# Altium PCB PCB1.PcbDoc
Units mm, origin at the board's own origin, x right, y up, seen from the top; angles counter-clockwise.
Board outline 50 x 40 mm, 4 copper layers (Top Layer, Layer 1, Layer 2, Bottom Layer), stack 1.56 mm thick; 21 components, 8 nets, 43 pads, 22 vias.
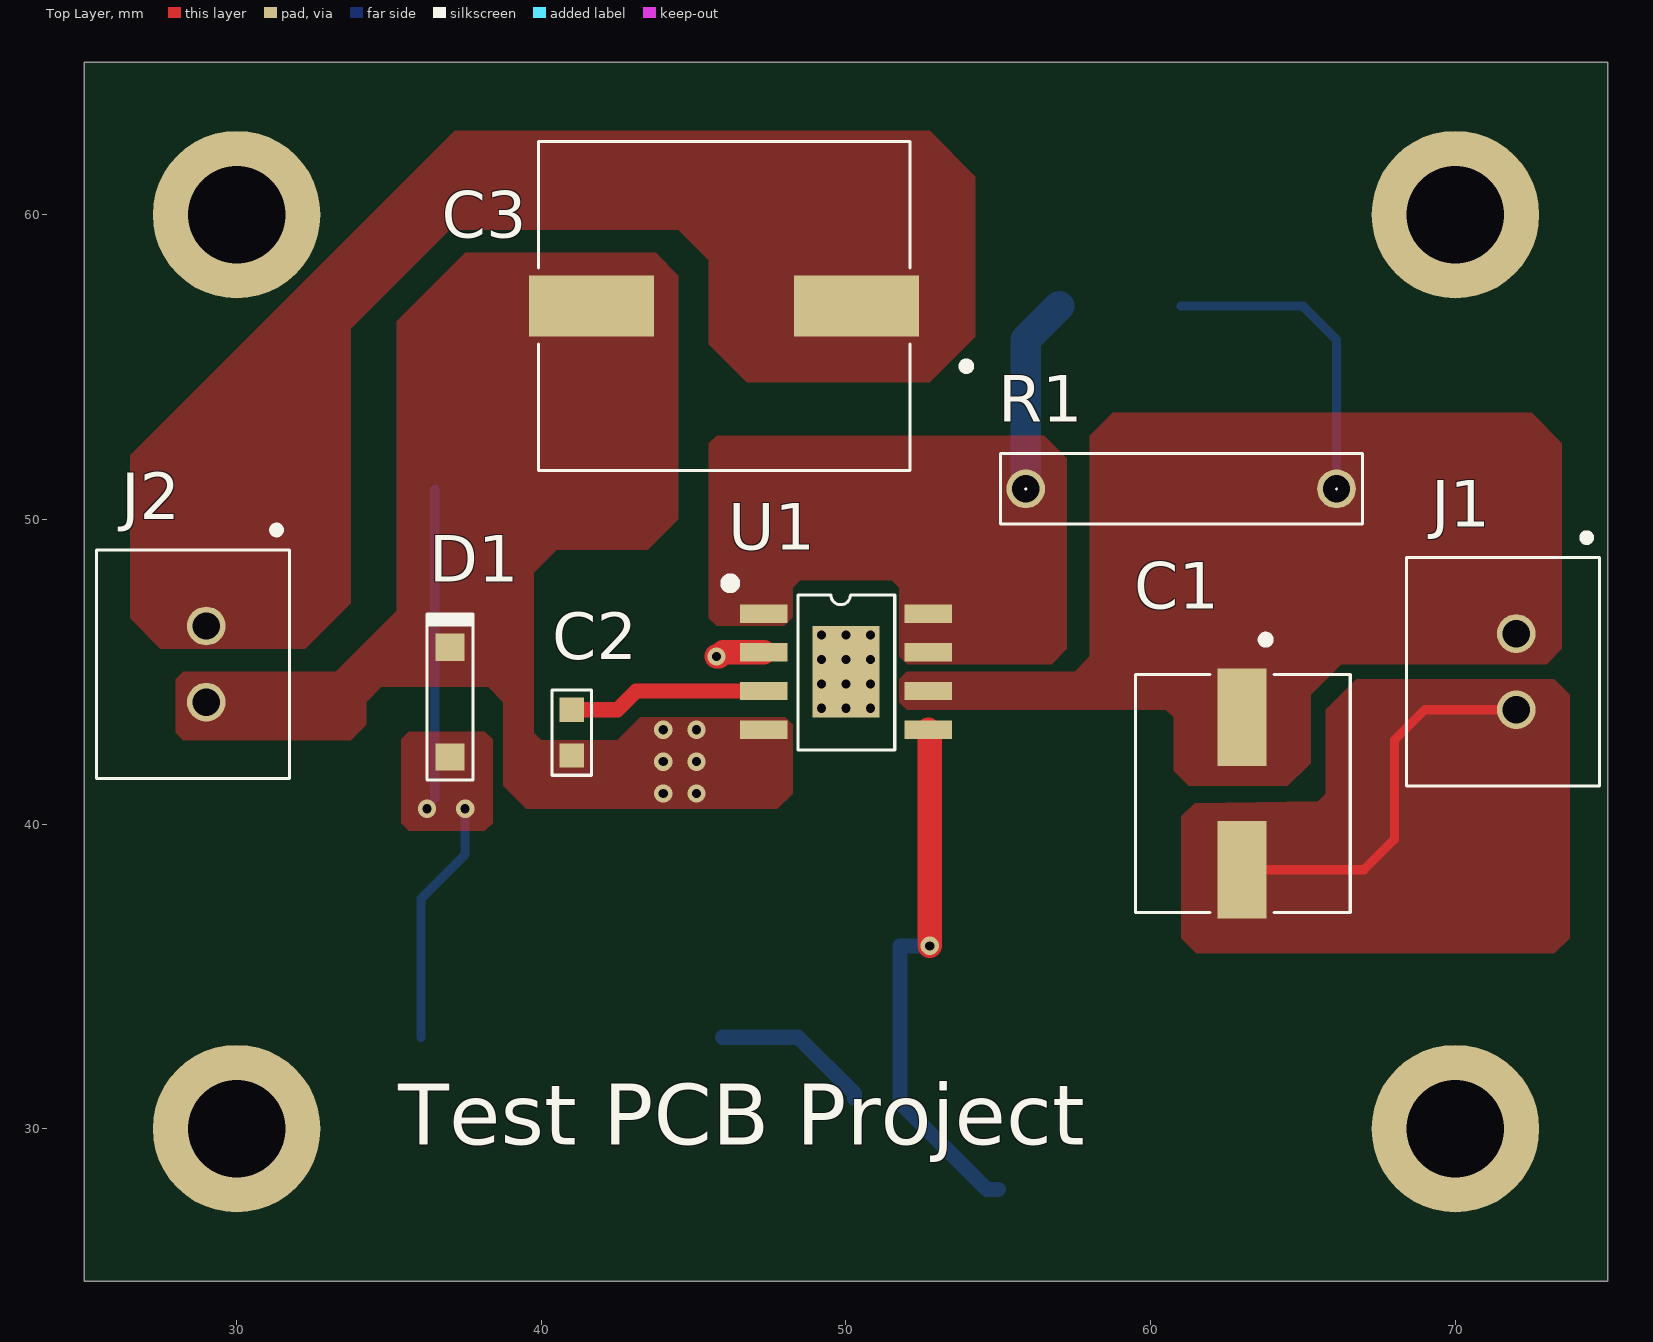
[diagram p0: Top Layer view]
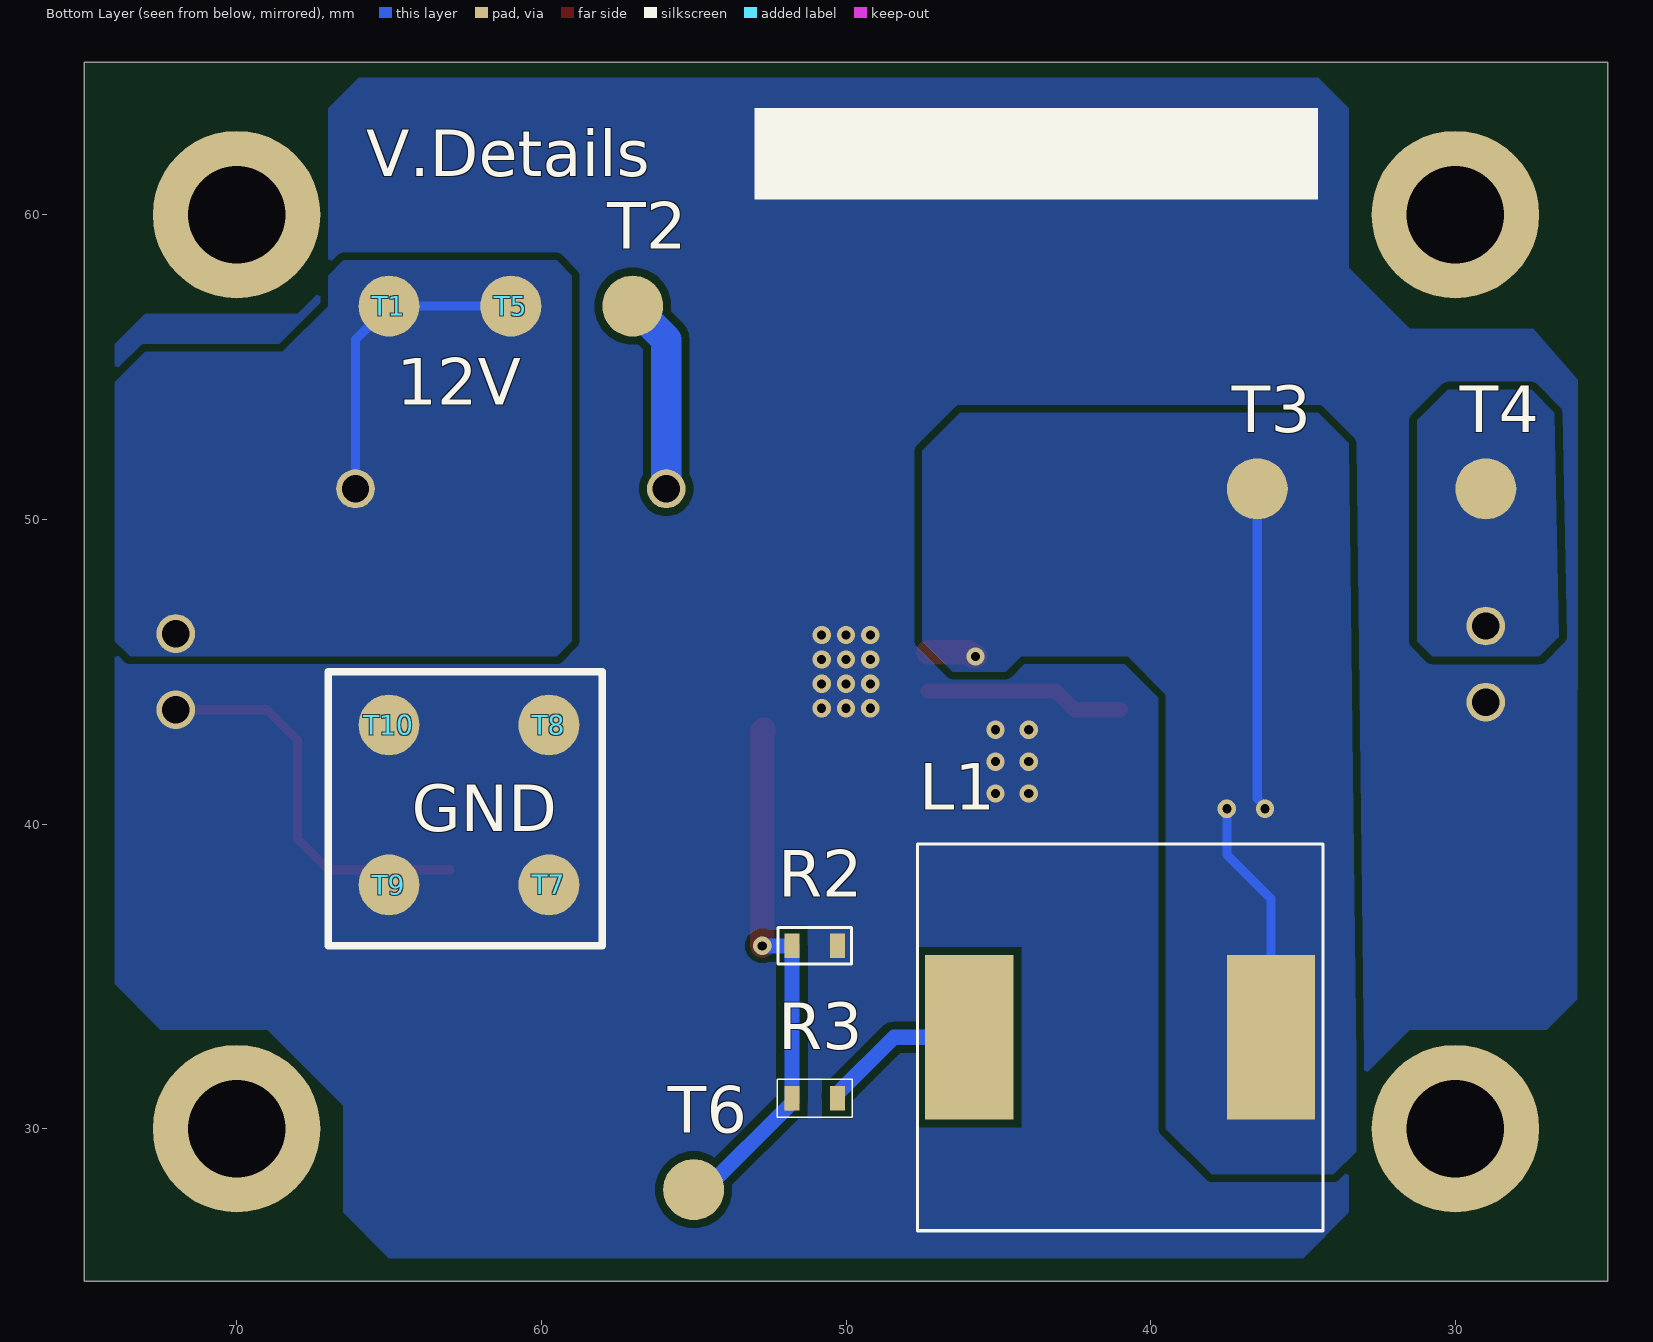
[diagram p1: Bottom Layer view, seen from below]
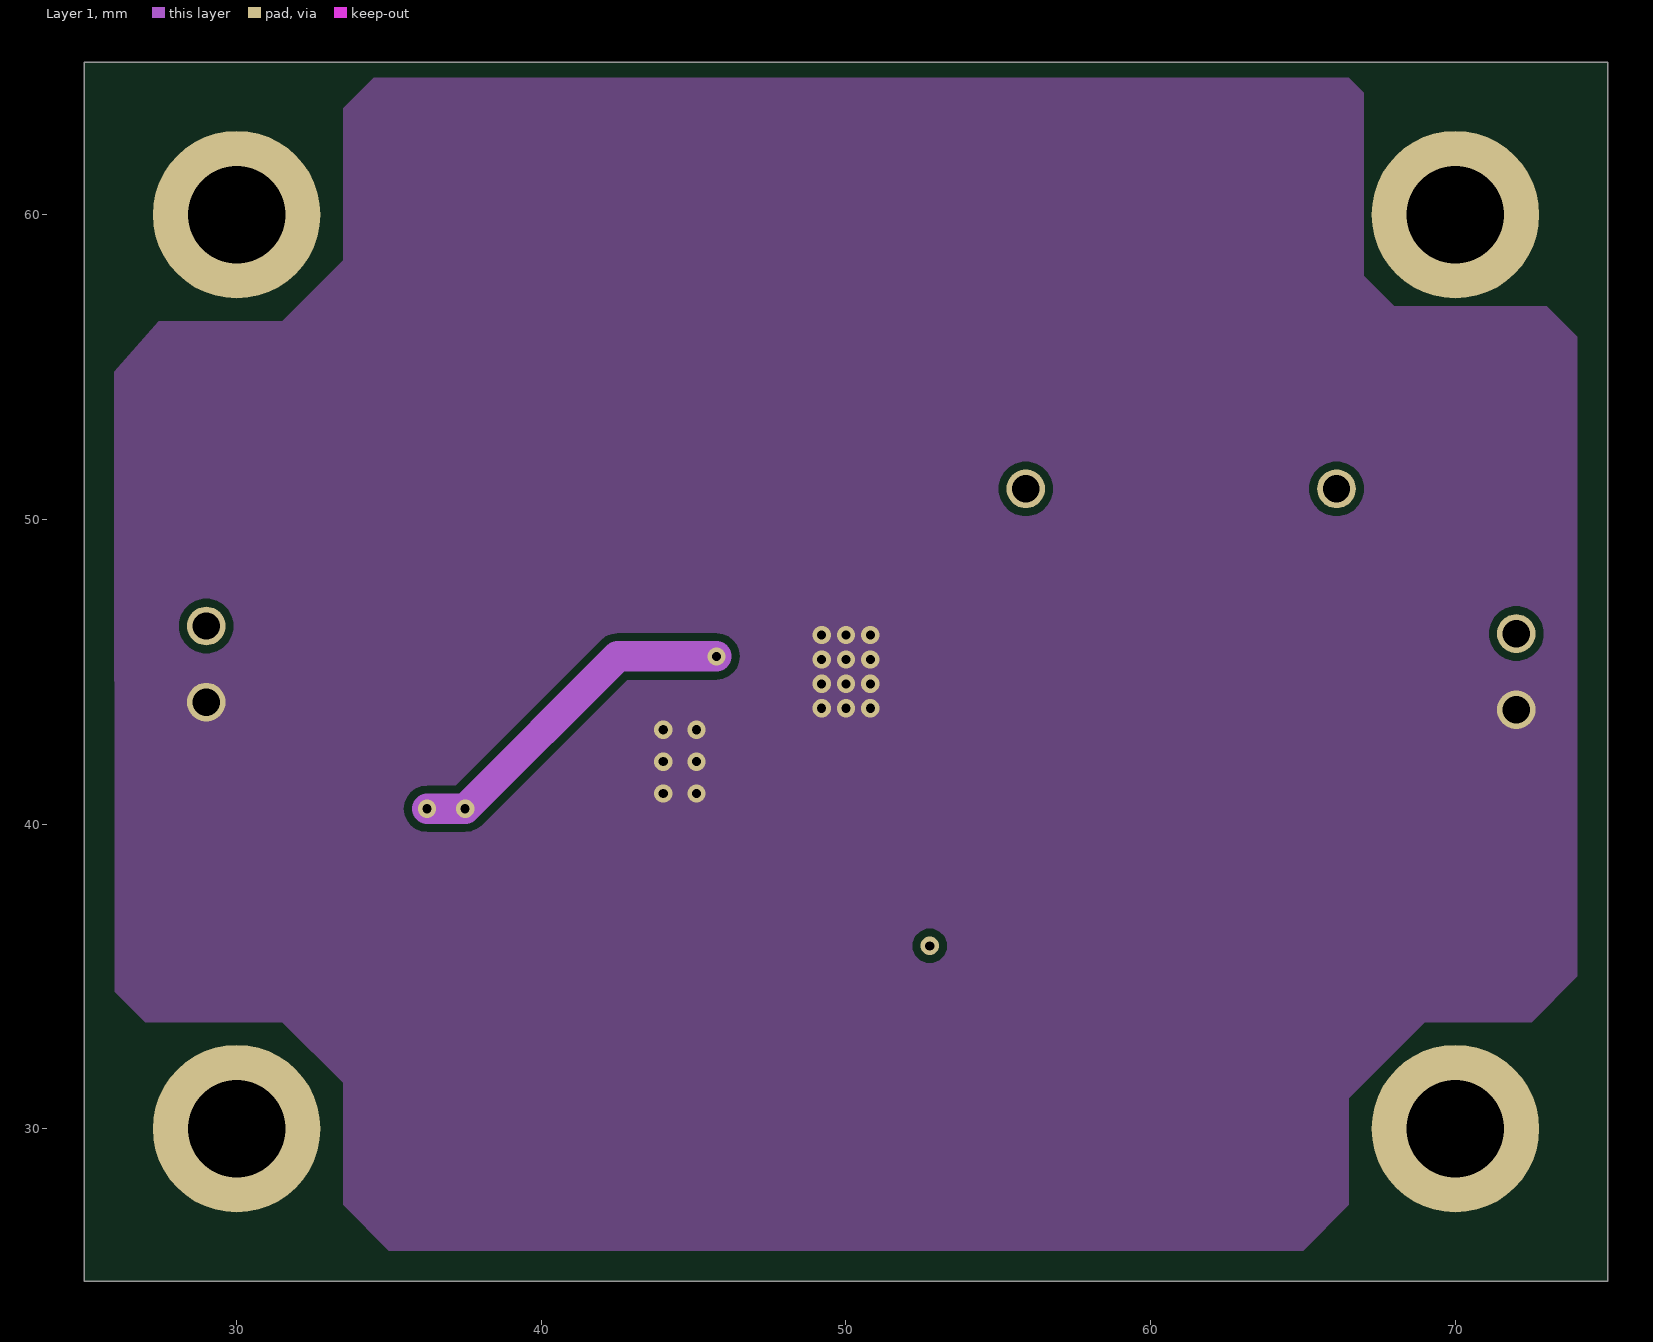
[diagram p2: Layer 1]
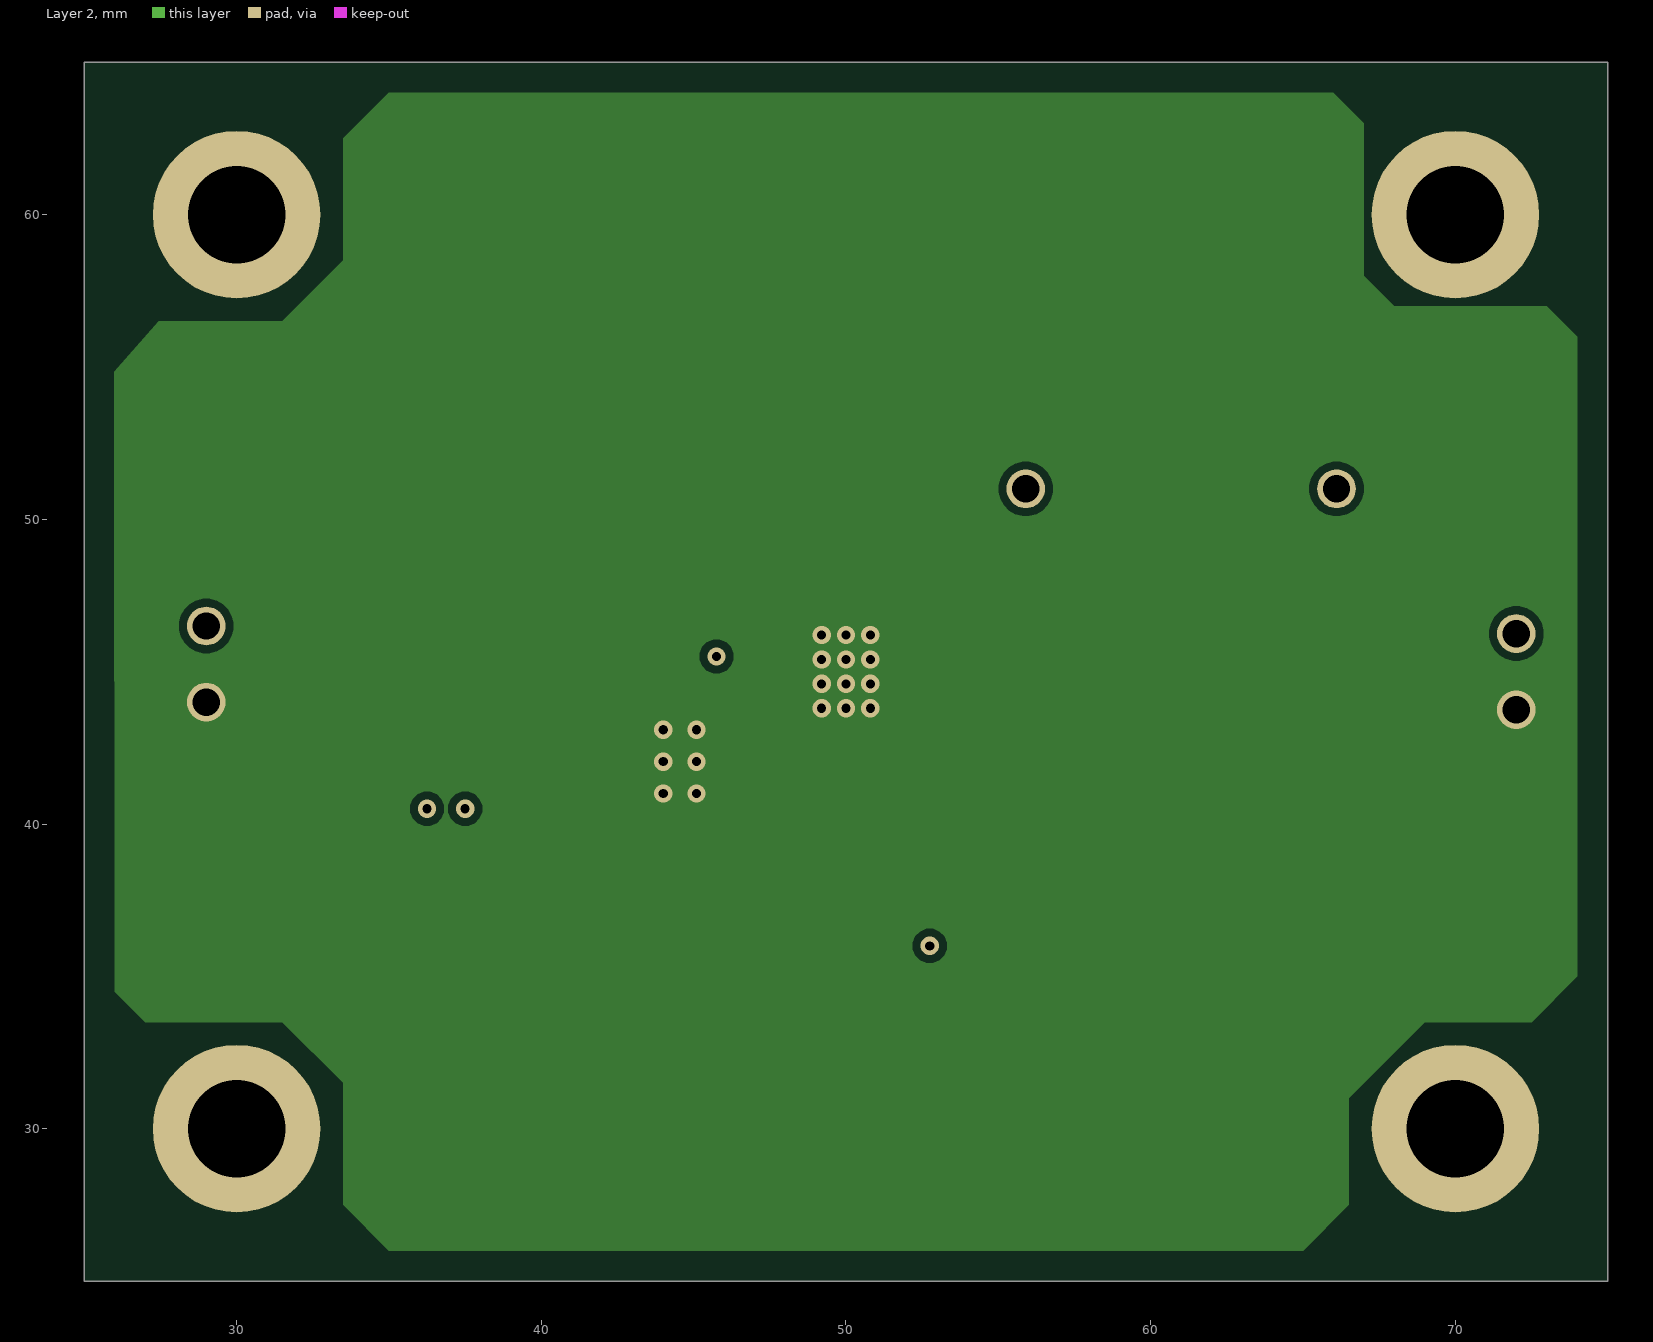
[diagram p3: Layer 2]
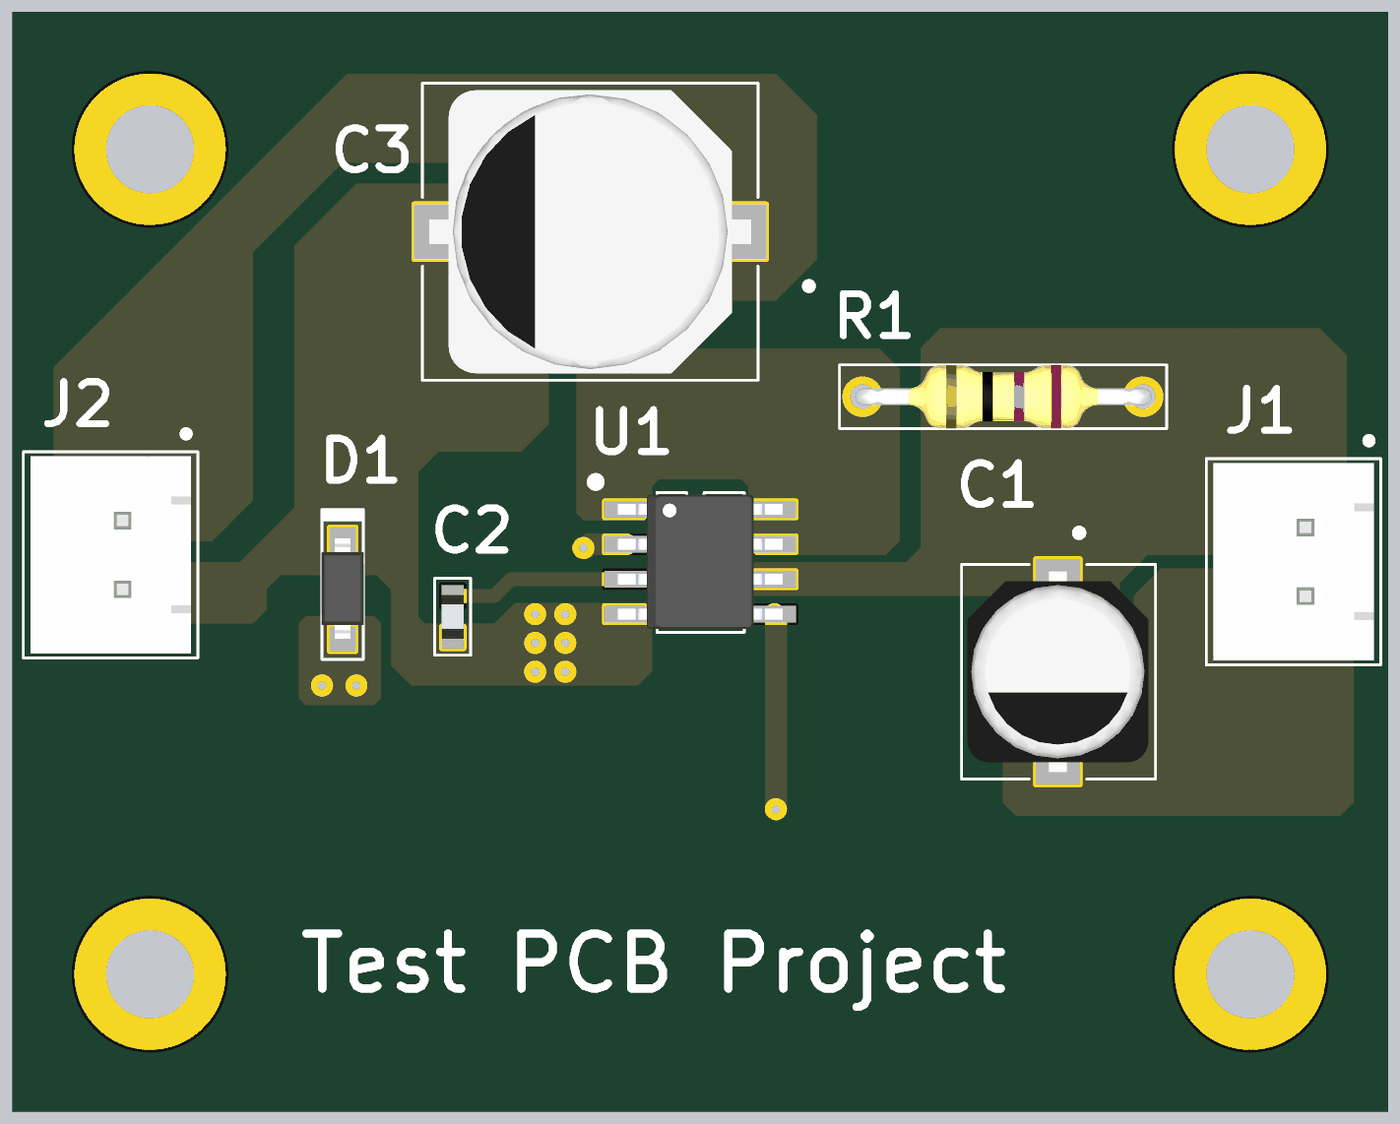
[diagram p4: 3D render of the assembled board from above, using the file's embedded part models]
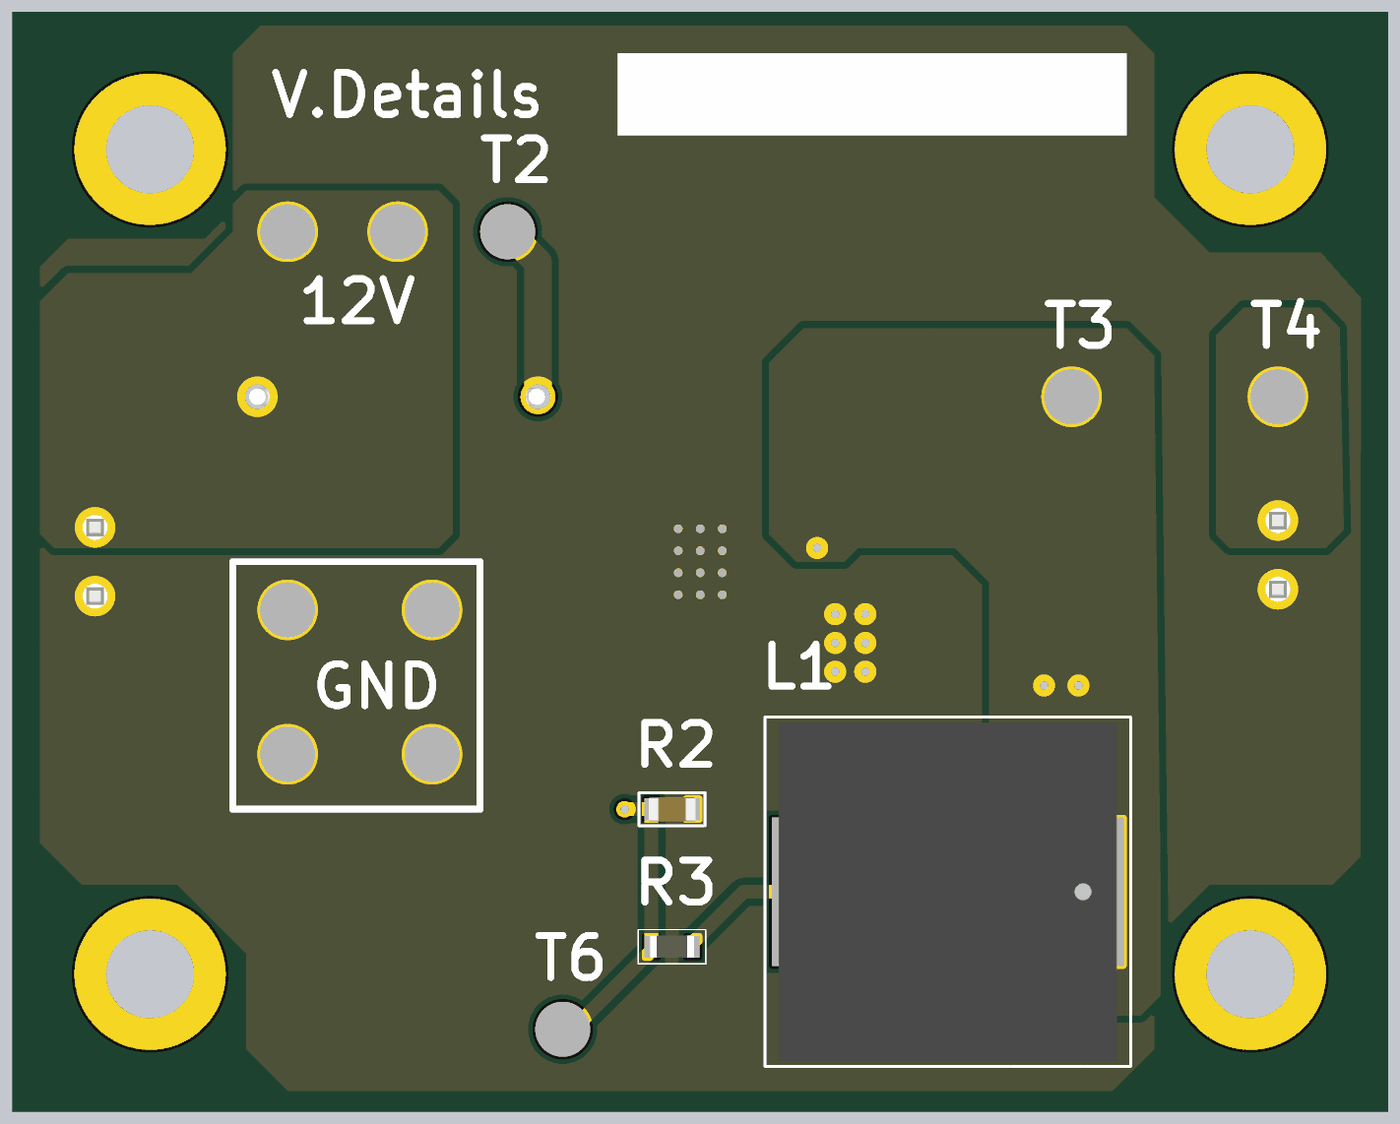
[diagram p5: 3D render of the assembled board from below, using the file's embedded part models]

## Layer stack, top to bottom
Top Solder: solder mask 0.01, Solder Resist, Dk 3.5
Top Layer: signal copper 0.035
Dielectric 2: prepreg 0.11, PP-006, Dk 4.1
Layer 1: signal copper 0.035
Dielectric 1: dielectric 1.2, FR-4, Dk 4.8
Layer 2: signal copper 0.035
Dielectric 3: prepreg 0.11, PP-006, Dk 4.1
Bottom Layer: signal copper 0.035
Bottom Solder: solder mask 0.01, Solder Resist, Dk 3.5

## Board outline
25,25 25,65 75,65 75,25

## Design rules (kind name [scope] priority, off if disabled: settings)
Clearance [All] p1: gap=0.254 ignorepadtopadclearanceinfootprint=FALSE except(0: Arc-Hole Track-Hole SMDPad-Hole THPad-Hole Via-Hole Fill-Hole Poly-Hole Region-Hole Text-Hole)
ComponentClearance [All] p1: gap=0.2 collisioncheckmode=3 verticalgap=0.2 showdistances=FALSE
HoleSize [All] p1: absolutevalues=TRUE maxlimit=10 minlimit=0.2 maxpercent=80.000 minpercent=20.000
HoleToHoleClearance [All] p1: gap=0.2 allowstackedmicrovias=TRUE
MinimumSolderMaskSliver [All] p1: minsoldermaskwidth=0.2
PlaneClearance [All] p1: clearance=0.2
PlaneConnect [All] p1: planeconnectstyle=Direct reliefexpansion=0.508 reliefentries=4 reliefconductorwidth=0.254 reliefairgap=0.254
PolygonConnect [All] p1: connectstyle=Direct reliefconductorwidth=0.254 reliefentries=4 polygonreliefangle="90 Angle" airgapwidth=0.254
RoutingVias [All] p1: holewidth=0.3 width=0.6 viastyle="Through Hole" minholewidth=0.3 minwidth=0.6 maxholewidth=0.3 maxwidth=0.6
SilkToSilkClearance [All] p1: silktosilkclearance=0.2
SilkToSolderMaskClearance [IsPad] p1: minsilkscreentomaskgap=0.2 clearancetoexposedcopper=TRUE
SolderMaskExpansion [All] p1: expansion=0.102 istentingtop=FALSE
Width [All] p1: maxlimit=10 minlimit=0.254 preferedwidth=0.3
22 further rules are at their usual default settings.

## Components (designator, comment, footprint, x,y, rotation, side; value= is the part's Value field where it differs from the comment)
C1 "EEEFK1C101P" EEE-FK1C101P 63,41 r90 top
C2 "885012006012" 885012006012 41,43 r90 top
C3 "EEEFK1E471P" EEE-FK1E471P 46,57 r0 top
D1 "1N5819" 1N5819 37,44 r90 top
J1 "B2B-EH-A(LF)(SN)" B2B-EH-A(LF)(SN) 72,45 r270 top
J2 "B2B-EH-A(LF)(SN)" B2B-EH-A(LF)(SN) 29,45.25 r270 top
L1 "74477120" 74477120_INDUCTOR 41,33 r270 bottom
R1 "H826R1BZA" H826R1BZA 61,51 r180 top value=26.1R
R2 "KTR03EZPF6201" KTR03EZPF6201 51.025,36 r180 bottom value=6.2kR
R3 "SDR03EZPJ202" SDR03EZPJ202 51,31 r0 bottom
T1 "Test Pad" "TEST POINT" 65,57 r180 bottom
T2 "Test Pad" "TEST POINT" 57,57 r180 bottom
T3 "Test Pad" "TEST POINT" 36.5,51 r180 bottom
T4 "Test Pad" "TEST POINT" 29,51 r180 bottom
T5 "Test Pad" "TEST POINT" 61,57 r180 bottom
T6 "Test Pad" "TEST POINT" 55,28 r180 bottom
T7 "Test Pad" "TEST POINT" 59.75,38 r180 bottom
T8 "Test Pad" "TEST POINT" 59.75,43.25 r180 bottom
T9 "Test Pad" "TEST POINT" 65,38 r0 bottom
T10 "Test Pad" "TEST POINT" 65,43.25 r180 bottom
U1 "MC34063ADR" MC34063ADR 50,45 r0 top

## Footprints (in the part's own frame and the unit in brackets; to place one, negate y for a bottom-side part, rotate by r counter-clockwise, add the part's x,y. Pads: shape width x height; smd on the part's side, far side on the other; paste and mask are expansions set on the pad)
1N5819 [mm] "SOD_23"
  rect 0.9x0.95 smd: 1(-1.8,0) 2(1.8,0)
  silkscreen extent -2.55,-0.75 2.9,0.75, body extent -1.8,-0.77 1.85,0.77, height 1.5
74477120_INDUCTOR [mm]
  rect 5.4x2.9 smd: 1(0,4.95) 2(0,-4.95)
  silkscreen extent -6.35,-6.65 6.35,6.65, body extent -6.15,-6.15 6.15,6.15, height 6.12
885012006012 [mm] "CAP_0603"
  rect 0.8x0.8 smd: 1(-0.75,0) 2(0.75,0)
  silkscreen extent -1.4,-0.65 1.4,0.65, body extent -0.8,-0.4 0.8,0.4, height 0.8
B2B-EH-A(LF)(SN) [mm] "JST 2-PIN CONN"
  round 1.27 hole 0.9: 1(-1.25,0) 2(1.25,0)
  silkscreen extent -4.51,-3.6 3.75,2.74, body extent -3.59,-3.35 3.59,2.49, height 7.26
EEE-FK1C101P [mm] "PANASONIC_CAP_AE_D"
  rect 3.2x1.6 smd: 1(-2.5,0) 2(2.5,0)
  silkscreen extent -3.9,-3.55 5.18,3.5, body extent -3.65,-3.3 3.65,3.3, height 5.83
EEE-FK1E471P [mm] "CAP_AE_G (ø10x10.2L)"
  rect 4.1x2 smd: 1(-4.35,0) 2(4.35,0)
  silkscreen extent -6.1,-5.4 8.08,5.4, body extent -5.85,-5.15 5.85,5.15, height 10.2
H826R1BZA [mm] "RES_TH"
  round 1.27 hole 0.9: 1(-5.1,0) 2(5.1,0)
  silkscreen extent -5.96,-1.16 5.93,1.16, body extent -5.4,-1.16 5.36,1.16, height 2.93
KTR03EZPF6201 [mm] "RES_0603"
  rect 0.5x0.8 smd: 1(-0.75,0) 2(0.75,0)
  silkscreen extent -1.2,-0.6 1.2,0.6, body extent -0.85,-0.44 0.85,0.44, height 0.56
MC34063ADR [mm] "SOP_8"
  rect 1.55x0.6 smd: 1(-2.7,1.905) 2(-2.7,0.635) 3(-2.7,-0.635) 4(-2.7,-1.905) 5(2.7,-1.905) 6(2.7,-0.635) 7(2.7,0.635) 8(2.7,1.905)
  rect 2.2x3 smd: 9(0,0)
  silkscreen extent -3.95,-2.57 1.6,3.05, body extent -3,-2.45 3,2.45, height 1.75
SDR03EZPJ202 [mm] "RES_0603"
  rect 0.5x0.8 smd: 1(-0.725,0) 2(0.775,0)
  silkscreen extent -1.2,-0.63 1.25,0.63, body extent -0.77,-0.4 0.83,0.4, height 0.55
"TEST POINT" [mm]
  round 2 smd: 1(0,0)

## Part data
C1: "Cap Aluminum 100uF 16V 20% (6.3 X 5.8mm) SMD 240mA 2000 hr 105°C T/R", Manufacturer=Panasonic, Supplier Part Number=667-EEE-FK1C101P, Category="Aluminum Electrolytic Capacitors", ComponentLink1Description=https://datasheet.ciiva.com/19479/1357482-19479360.pdf?src-supplier=Jameco, ComponentLink1URL=https://datasheet.ciiva.com/19479/1357482-19479360.pdf?src-supplier=Jameco, ComponentLink2Description=https://datasheet.ciiva.com/11777/0900766b80e4e8b0-11777237.pdf?src-supplier=Rs, ComponentLink2URL=https://datasheet.ciiva.com/11777/0900766b80e4e8b0-11777237.pdf?src-supplier=Rs, ComponentLink3Description=https://datasheet.ciiva.com/29313/443464-da-01-en-smd-elko-vfk-d-100-uf-16v-29313488.pdf?src-supplier=Conrad, ComponentLink3URL=https://datasheet.ciiva.com/29313/443464-da-01-en-smd-elko-vfk-d-100-uf-16v-29313488.pdf?src-supplier=Conrad, ComponentLink4Description=https://datasheet.ciiva.com/16449/aba0000ce120-16449534.pdf?src-supplier=Future+Electronics, ComponentLink4URL=https://datasheet.ciiva.com/16449/aba0000ce120-16449534.pdf?src-supplier=Future+Electronics, ComponentLink5Description=https://datasheet.ciiva.com/24022/aba0000ce120-24022554.pdf?src-supplier=Mouser, ComponentLink5URL=https://datasheet.ciiva.com/24022/aba0000ce120-24022554.pdf?src-supplier=Mouser, ComponentLink6Description=https://datasheet.ciiva.com/43463/58258-43463495.pdf?src-supplier=Farnell, ComponentLink6URL=https://datasheet.ciiva.com/43463/58258-43463495.pdf?src-supplier=Farnell, ComponentLink7Description=https://datasheet.ciiva.com/2983/aba0000ce120-2983939.pdf?src-supplier=Avnet, ComponentLink7URL=https://datasheet.ciiva.com/2983/aba0000ce120-2983939.pdf?src-supplier=Avnet, ComponentLink8Description=https://datasheet.ciiva.com/30177/aba0000ce120-30177788.pdf?src-supplier=Onlinecomponents.com, ComponentLink8URL=https://datasheet.ciiva.com/30177/aba0000ce120-30177788.pdf?src-supplier=Onlinecomponents.com, ComponentLink9Description=https://datasheet.ciiva.com/14601/70255214-14601005.pdf?src-supplier=Allied+Electronics, ComponentLink9URL=https://datasheet.ciiva.com/14601/70255214-14601005.pdf?src-supplier=Allied+Electronics, ComponentLink10Description=https://datasheet.ciiva.com/46387/1676921-46387918.pdf?src-supplier=Element14, ComponentLink10URL=https://datasheet.ciiva.com/46387/1676921-46387918.pdf?src-supplier=Element14, ComponentLink11Description=https://datasheet.ciiva.com/46376/1676921-46376425.pdf?src-supplier=Element14, ComponentLink11URL=https://datasheet.ciiva.com/46376/1676921-46376425.pdf?src-supplier=Element14, Manufacturer Part Number=EEEFK1C101P, Pricing="1=0.45, 10=0.243, 50=0.243, 100=0.211, 1000=0.125, 10000=0.106 (USD)", RoHS=Yes, Stock=76012, Supplier=Mouser
C2: "Ceramic Capacitor 470pF, 10VDC, 0603, ±5 %", Manufacturer="Wurth Electronics", Supplier Part Number=732-7756-1-ND, Category="Ceramic Capacitors", ComponentLink1Description=http://www.farnell.com/datasheets/2546579.pdf?src-supplier=Farnell, ComponentLink1URL=http://www.farnell.com/datasheets/2546579.pdf?src-supplier=Farnell, ComponentLink2Description=https://katalog.we-online.de/pbs/datasheet/885012006012.pdf?src-supplier=Digi-Key, ComponentLink2URL=https://katalog.we-online.de/pbs/datasheet/885012006012.pdf?src-supplier=Digi-Key, ComponentLink3Description=http://www.farnell.com/datasheets/2546579.pdf?src-supplier=Newark, ComponentLink3URL=http://www.farnell.com/datasheets/2546579.pdf?src-supplier=Newark, Manufacturer Part Number=885012006012, Pricing="1=0.1, 10=0.044, 100=0.039, 500=0.035 (USD)", RoHS=Yes, Stock=15812, Supplier=Digi-Key
C3: "CAP ALUM 470UF 20% 25V SMD", Manufacturer=Panasonic, Supplier Part Number=667-EEE-FK1E471P, Category="Aluminum Electrolytic Capacitors", ComponentLink1Description=https://datasheet.ciiva.com/11777/0900766b80e4e8b0-11777352.pdf?src-supplier=Rs, ComponentLink1URL=https://datasheet.ciiva.com/11777/0900766b80e4e8b0-11777352.pdf?src-supplier=Rs, ComponentLink2Description=https://datasheet.ciiva.com/29313/443472-da-01-en-smd-elko-vfk-g-470-uf-25v-29313562.pdf?src-supplier=Conrad, ComponentLink2URL=https://datasheet.ciiva.com/29313/443472-da-01-en-smd-elko-vfk-g-470-uf-25v-29313562.pdf?src-supplier=Conrad, ComponentLink3Description=https://datasheet.ciiva.com/46376/1676921-46376477.pdf?src-supplier=Element14, ComponentLink3URL=https://datasheet.ciiva.com/46376/1676921-46376477.pdf?src-supplier=Element14, ComponentLink4Description=https://datasheet.ciiva.com/46381/1676921-46381499.pdf?src-supplier=Element14, ComponentLink4URL=https://datasheet.ciiva.com/46381/1676921-46381499.pdf?src-supplier=Element14, ComponentLink5Description=https://datasheet.ciiva.com/46381/58258-46381500.pdf?src-supplier=Element14, ComponentLink5URL=https://datasheet.ciiva.com/46381/58258-46381500.pdf?src-supplier=Element14, ComponentLink6Description=https://datasheet.ciiva.com/16432/aba0000ce120-16432909.pdf?src-supplier=Future+Electronics, ComponentLink6URL=https://datasheet.ciiva.com/16432/aba0000ce120-16432909.pdf?src-supplier=Future+Electronics, Manufacturer Part Number=EEEFK1E471P, Pricing="1=0.97, 10=0.67, 50=0.67, 100=0.505, 1000=0.328, 10000=0.318 (USD)", RoHS=Yes, Stock=24677, Supplier=Mouser
D1: "1N5819 Series Low Drop Power 1 A 40 V Schottky Rectifier Through Hole - DO-41", Manufacturer="Taiwan Semiconductor", Supplier Part Number=1801-1N5819CT-ND, Category="Schottky Diodes", ComponentLink1Description=https://datasheet.ciiva.com/26338/155370-da-01-en-schottky-diode-1-n-5819-tsc-do-41-26338776.pdf?src-supplier=Conrad, ComponentLink1URL=https://datasheet.ciiva.com/26338/155370-da-01-en-schottky-diode-1-n-5819-tsc-do-41-26338776.pdf?src-supplier=Conrad, ComponentLink2Description=https://datasheet.ciiva.com/26309/ql600260-600262-e-26309355.pdf?src-supplier=Distrelec, ComponentLink2URL=https://datasheet.ciiva.com/26309/ql600260-600262-e-26309355.pdf?src-supplier=Distrelec, ComponentLink3Description=https://datasheet.ciiva.com/24491/1n581720series-c10-24491580.pdf?src-supplier=Onlinecomponents.com, ComponentLink3URL=https://datasheet.ciiva.com/24491/1n581720series-c10-24491580.pdf?src-supplier=Onlinecomponents.com, Manufacturer Part Number=1N5819, Pricing="1=0.49, 10=0.399, 100=0.2719, 500=0.20392, 1000=0.15294, 2000=0.1402 (USD)", RoHS=Yes, Stock=2706, Supplier=Digi-Key
J1 J2: "CONN HEADER EH TOP 2POS 2.5MM", Manufacturer=JST, Category="Headers and Wire Housings", ComponentLink1Description=https://datasheet.ciiva.com/26924/getdatasheetpartid-639961-26924027.pdf?src-supplier=Verical, ComponentLink1URL=https://datasheet.ciiva.com/26924/getdatasheetpartid-639961-26924027.pdf?src-supplier=Verical, ComponentLink2Description=https://datasheet.ciiva.com/11746/0900766b805aab1f-11746167.pdf?src-supplier=Rs, ComponentLink2URL=https://datasheet.ciiva.com/11746/0900766b805aab1f-11746167.pdf?src-supplier=Rs, ComponentLink3Description=https://datasheet.ciiva.com/41451/001217319-da-01-en-stiftleiste-gerade-2-pol-rm-25mm-41451366.pdf?src-supplier=Conrad, ComponentLink3URL=https://datasheet.ciiva.com/41451/001217319-da-01-en-stiftleiste-gerade-2-pol-rm-25mm-41451366.pdf?src-supplier=Conrad, ComponentLink4Description=https://datasheet.ciiva.com/712/eeh-712441.pdf?src-supplier=Digi-Key, ComponentLink4URL=https://datasheet.ciiva.com/712/eeh-712441.pdf?src-supplier=Digi-Key, ComponentLink5Description=https://datasheet.ciiva.com/16449/b2b-eh-alfsn-16449468.pdf?src-supplier=Future+Electronics, ComponentLink5URL=https://datasheet.ciiva.com/16449/b2b-eh-alfsn-16449468.pdf?src-supplier=Future+Electronics, Manufacturer Part Number=B2B-EH-A(LF)(SN), Pricing="1=0.1297, 10=0.0976, 25=0.0965, 50=0.0955, 100=0.0702, 500=0.0452 (USD)", RoHS=Yes, Stock=19411, Supplier="Arrow Electronics", Supplier Part Number=B2B-EH-A(LF)(SN)
L1: "Power Choke Shielded Wirewound 100uH 20% 1KHz Ferrite 1.53A 160mOhm DCR T/R", Manufacturer="Wurth Electronics", Supplier Part Number=3338500P, Category="Fixed Inductors", ComponentLink1Description=https://datasheet.ciiva.com/1052/74477120-1052278.pdf?src-supplier=Digi-Key, ComponentLink1URL=https://datasheet.ciiva.com/1052/74477120-1052278.pdf?src-supplier=Digi-Key, ComponentLink2Description=https://datasheet.ciiva.com/4954/74477120-29022-4954590.pdf?src-supplier=Mouser, ComponentLink2URL=https://datasheet.ciiva.com/4954/74477120-29022-4954590.pdf?src-supplier=Mouser, ComponentLink3Description=https://datasheet.ciiva.com/11799/0900766b80bbd134-11799893.pdf?src-supplier=Rs, ComponentLink3URL=https://datasheet.ciiva.com/11799/0900766b80bbd134-11799893.pdf?src-supplier=Rs, ComponentLink4Description=https://datasheet.ciiva.com/1052/74477120-1052279.pdf?src-supplier=Digi-Key, ComponentLink4URL=https://datasheet.ciiva.com/1052/74477120-1052279.pdf?src-supplier=Digi-Key, ComponentLink5Description=https://datasheet.ciiva.com/1052/74477120-1052280.pdf?src-supplier=Digi-Key, ComponentLink5URL=https://datasheet.ciiva.com/1052/74477120-1052280.pdf?src-supplier=Digi-Key, ComponentLink6Description=https://datasheet.ciiva.com/26308/rl74477120-data-de-26308263.pdf?src-supplier=Distrelec, ComponentLink6URL=https://datasheet.ciiva.com/26308/rl74477120-data-de-26308263.pdf?src-supplier=Distrelec, ComponentLink7Description=https://datasheet.ciiva.com/48691/001087759-da-01-ml-we-pd-smd-speicherdrossel-74477120-de-en-48691212.pdf?src-supplier=Conrad, ComponentLink7URL=https://datasheet.ciiva.com/48691/001087759-da-01-ml-we-pd-smd-speicherdrossel-74477120-de-en-48691212.pdf?src-supplier=Conrad, Manufacturer Part Number=74477120, RoHS=Yes, Stock=1, Supplier=Rs
R1: "Metal Film Resistors - Through Hole H8 26R1 0.1% 100PPM", Case/Package=Axial, Manufacturer="TE Connectivity", Max Operating Temperature=155°C, Max Power Dissipation=250mW, Min Operating Temperature=-55°C, Number of Resistors=1, Package Quantity=250, Resistor Type="Thin Film", Supplier Part Number=H826R1BZA-ND, Temperature Coefficient=100ppm/°C, Tolerance=0.1%, Voltage Rating=350V, Category=Uncategorized, ComponentLink1Description=https://datasheet.ciiva.com/12654/eng-ds-1773230-g-12654485.pdf?src-supplier=Mouser, ComponentLink1URL=https://datasheet.ciiva.com/12654/eng-ds-1773230-g-12654485.pdf?src-supplier=Mouser, Diameter=2.5mm, ELV=Compliant, Length=7.2mm, Manufacturer Part Number=H826R1BZA, Mounting Technology=Axial, Number of Terminations=2, Packaging=Bulk, Power Rating=250mW, Pricing="500=0.61476 (USD)", RoHS=Yes, RoHS Compliant=Yes, Series="Holco, Holsworthy", Supplier=Digi-Key, Termination=Axial, Weight=0.008466oz
R2: "Res High Voltage 0603 6.2K Ohm 1/10W 1% SMD", Case Code (Imperial)=0603, Case Code (Metric)=1608, Manufacturer=Rohm, Max Operating Temperature=155°C, Max Power Dissipation=100mW, Min Operating Temperature=-55°C, Ratings=AEC-Q200, Supplier Part Number=RHM6.2KAYCT-ND, Temperature Coefficient=100ppm/°C, Tolerance=1%, Case/Package=0603, Category="Chip SMD Resistors", ComponentLink1Description=https://datasheet.ciiva.com/14928/ktr-14928509.pdf?src-supplier=Digi-Key, ComponentLink1URL=https://datasheet.ciiva.com/14928/ktr-14928509.pdf?src-supplier=Digi-Key, ComponentLink2Description=https://datasheet.ciiva.com/14930/ktr-14930279.pdf?src-supplier=Digi-Key, ComponentLink2URL=https://datasheet.ciiva.com/14930/ktr-14930279.pdf?src-supplier=Digi-Key, ComponentLink3Description=https://datasheet.ciiva.com/14924/ktr-14924957.pdf?src-supplier=Digi-Key, ComponentLink3URL=https://datasheet.ciiva.com/14924/ktr-14924957.pdf?src-supplier=Digi-Key, Features="Automotive AEC-Q200", Manufacturer Part Number=KTR03EZPF6201, Number of Terminations=2, Packaging="Cut Tape", Pricing="1=0.16, 10=0.133, 50=0.0702, 100=0.0521, 500=0.03152, 1000=0.02182 (USD)", RoHS=Yes, RoHS Compliant=Yes, Series=KTR, Stock=7098, Supplier=Digi-Key
R3: "Res Thick Film 0603 2K Ohm 5% 0.3W ±200ppm/C Pad SMD Automotive T/R", Manufacturer=Rohm, Supplier Part Number=511-1749-1-ND, Category="Chip SMD Resistors", ComponentLink1Description=https://www.rohm.com/datasheet/SDR03EZPJ/sdr-e?src-supplier=Digi-Key, ComponentLink1URL=https://www.rohm.com/datasheet/SDR03EZPJ/sdr-e?src-supplier=Digi-Key, Manufacturer Part Number=SDR03EZPJ202, Pricing="1=0.1, 10=0.092, 50=0.0494, 100=0.0354, 500=0.02192, 1000=0.01555 (USD)", RoHS=Yes, RoHS Compliant=Yes, Stock=27252, Supplier=Digi-Key
T1 T2 T3 T4 T5 T6 T7 T8 T9 T10: library part Test_Pad
U1: "Buck, Boost Switching Regulator IC Positive or Negative Adjustable 1.25V 1 Output 1.5A (Switch) 8-SOIC (0.154, 3.90mm Width)", Manufacturer="Texas Instruments", Supplier Part Number=595-MC34063ADR, Category="Voltage Regulators - Switching", ComponentLink1Description=https://datasheet.ciiva.com/7408/1862376-7408060.pdf?src-supplier=Newark, ComponentLink1URL=https://datasheet.ciiva.com/7408/1862376-7408060.pdf?src-supplier=Newark, ComponentLink2Description=https://datasheet.ciiva.com/2025/mc33063a-2025161.pdf?src-supplier=Digi-Key, ComponentLink2URL=https://datasheet.ciiva.com/2025/mc33063a-2025161.pdf?src-supplier=Digi-Key, ComponentLink3Description=https://datasheet.ciiva.com/2025/mc33063a-2025162.pdf?src-supplier=Digi-Key, ComponentLink3URL=https://datasheet.ciiva.com/2025/mc33063a-2025162.pdf?src-supplier=Digi-Key, ComponentLink4Description=https://datasheet.ciiva.com/2025/mc33063a-2025163.pdf?src-supplier=Digi-Key, ComponentLink4URL=https://datasheet.ciiva.com/2025/mc33063a-2025163.pdf?src-supplier=Digi-Key, Manufacturer Part Number=MC34063ADR, Pricing="1=0.71, 10=0.591, 50=0.591, 100=0.448, 1000=0.305, 10000=0.247 (USD)", RoHS=Yes, Stock=38934, Supplier=Mouser

## Free pads (board coordinates)
  round 5.5 hole 3.2: 3(30,60) 4(70,60) 5(70,30) 6(30,30)

## Via types
v1: diameter 0.6, hole 0.3, Top Layer to Bottom Layer, 22 vias

## Nets (pads, with @x,y where several pads share a name; then routed paths per layer and width w, separated by ;. In a path a pad name is that pad's centre, name@x,y a point inside that pad or via, vN(x,y) a via of type N, cw(c..) or ccw(c..) an arc to the next point about the centre after c; other vN are vias at no path point)
5V: C3.2 J2.1 T4.1
12V: C1.2 J1.1 R1.1 T1.1 T5.1 U1.6 | length 10.5
  Bottom Layer w0.3: T5.1 T1.1 66.1,55.9 R1.1
CII: R2.1 R3.2 T6.1 U1.5 | length 17.6
  Top Layer w0.8: U1.5 52.75,43.045 v1(52.75,36)
  Bottom Layer w0.5: v1(52.75,36) R2.1 R3.2 51.775,30.85 54.625,28 T6.1
GND: C1.1 C2.1 C3.1 D1.2 J1.2 J2.2 R2.2 T7.1 T8.1 T9.1 T10.1 U1.4 U1.9 | length 13.1
  Top Layer w0.3: C1.1 67,38.5 68,39.5 68,42.75 69,43.75 J1.2
  other v1: 44,41 45.095,41 44,42.047 45.095,42.047 44,43.095 45.095,43.095 49.2,43.8 50,43.8 50.8,43.8 49.2,44.6 50,44.6 50.8,44.6 49.2,45.4 50,45.4 50.8,45.4 49.2,46.2 50,46.2 50.8,46.2
IN_Signal: R1.2 T2.1 U1.1 U1.7 U1.8 | length 6.5
  Bottom Layer w1: R1.2 55.9,55.9 T2.1
NetC2_2: C2.2 U1.3 | length 6.6
  Top Layer w0.5: C2.2 42.5,43.75 43.115,44.365 U1.3
NetL1_2: L1.2 R3.1 | length 5.2
  Bottom Layer w0.5: L1.2 48.425,33 50.275,31.15 R3.1
SE: D1.1 L1.1 T3.1 U1.2 | length 31.9
  Top Layer w0.8: v1(45.75,45.5) 45.831,45.5 45.966,45.635 U1.2
  Layer 1 w1: v1(36.25,40.5) v1(37.5,40.5) 42.5,45.5 v1(45.75,45.5)
  Bottom Layer w0.3: L1.1 36.05,37.55 37.5,39 v1(37.5,40.5) ; v1(36.25,40.5) 36.25,40.581 36.5,40.831 T3.1

## Polygon pours and split planes (outlines as drawn)
GND on Top Layer "GND_L01_P013" (solid, pour order 13): 61.442,40.681 61.012,40.25 61,40.25 61,36.25 61.5,35.75 73.25,35.75 73.75,36.25 73.75,44.25 73.25,44.75 66.75,44.75 65.75,43.75 65.75,41 65.5,40.75
12V on Top Layer "12V_L01_P012" (solid, pour order 12): 52,45 51.75,44.75 51.75,44 52,43.75 60.5,43.75 60.75,43.5 60.75,41.75 61.25,41.25 64.5,41.25 65.25,42 65.25,44.25 66.25,45.25 73,45.25 73.5,45.75 73.5,52.5 72.5,53.5 58.75,53.5 58,52.75 58,45.5 57.5,45
IN_Signal on Top Layer "IN_SIGNAL_L01_P004" (solid, pour order 4): 45.5,46.75 45.75,46.5 47.97,46.5 48.25,46.78 48.25,47.75 48.5,48 51.5,48 51.75,47.75 51.75,45.51 52.01,45.25 56.75,45.25 57.25,45.75 57.25,52 56.5,52.75 45.75,52.75 45.5,52.5
5V on Top Layer "5V_L01_P003" (solid, pour order 3): 26.5,46.75 27.5,45.75 32.25,45.75 33.75,47.25 33.75,56.25 37,59.5 44.5,59.5 45.5,58.5 45.5,55.75 46.75,54.5 52.75,54.5 54.25,56 54.25,61.25 52.75,62.75 37.15,62.75 26.5,52.1
GND on Top Layer "GND_L01_P002" (solid, pour order 2): 28,44.75 28,43 28.25,42.75 33.75,42.75 34.25,43.25 34.25,44 34.75,44.5 38.25,44.5 38.75,44 38.75,41.25 39.5,40.5 47.75,40.5 48.25,41 48.25,43.25 48,43.5 43.25,43.5 42.5,42.75 40,42.75 39.75,43 39.75,48.25 40.5,49 43.5,49 44.5,50 44.5,58 43.75,58.75 37.5,58.75 35.25,56.5 35.25,47 33.25,45 28.25,45
SE on Top Layer "SE_L01_P000" (solid, pour order 0): 35.65,43.025 35.4,42.775 35.4,40.025 35.65,39.775 38.15,39.775 38.4,40.025 38.4,42.775 38.15,43.025
GND on Layer 1 "GND" (solid, pour order 16): 27.44,56.5 25.978,54.839 26.002,34.498 27,33.5 31.5,33.5 33.5,31.5 33.5,27.5 35,26 65,26 66.5,27.5 66.5,31 69,33.5 72.5,33.5 74,35 74,56 73,57 68,57 67,58 67,64 66.5,64.5 34.5,64.5 33.5,63.5 33.5,58.5 31.5,56.5
GND on Layer 1 "GND_L02_P007" (solid, pour order 7): 27.75,45.25 26.5,44 26.5,38 27.5,37 46.75,37 48,38.25 48,43 46.5,44.5 43,44.5 41,42.5 41,40 40,39 34.5,39 33.5,40 33.5,44 32.25,45.25
GND on Bottom Layer "GND" (solid, pour order 17): 27.44,56.25 25.978,54.589 26.002,34.248 27,33.25 31.5,33.25 33.5,31.25 33.5,27.25 35,25.75 65,25.75 66.5,27.25 66.5,30.75 69,33.25 72.5,33.25 74,34.75 74,55.75 73,56.75 68,56.75 67,57.75 67,63.5 66,64.5 34.5,64.5 33.5,63.5 33.5,58.25 31.5,56.25
12V on Bottom Layer "12V_L04_P011" (solid, pour order 11): 59.5,58.5 59,58 59,46 59.5,45.5 73.5,45.5 74,46 74,54.5 73,55.5 68.5,55.5 67,57 67,58 66.5,58.5
5V on Bottom Layer "5V_L04_P010" (solid, pour order 10): 26.6,46.15 27.25,45.5 30.75,45.5 31.25,46 31.25,53.25 30.25,54.25 27.5,54.25 26.75,53.5
SE on Bottom Layer "SE_L04_P009" (solid, pour order 9): 33.25,32.25 33.25,29.25 34,28.5 38,28.5 39.5,30 39.5,44.25 40.75,45.5 44.25,45.5 44.75,45 46.5,45 47.5,46 47.5,52.25 46.25,53.5 34.5,53.5 33.5,52.5
GND on Bottom Layer "GND_L04_P008" (solid, pour order 8): 48.5,35.75 49,35.25 50.75,35.25 51,35.5 51,38 51.75,38.75 56.5,38.75 57,38.25 57,35.25 58,34.25 73,34.25 73.75,35 73.75,44.25 73,45 56.25,45 54.5,43.25 54.5,41.5 53.75,40.75 48.25,40.75 47.5,41.5 47.5,43.5 46.5,44.5 41,44.5 40.5,44 40.5,38.5 41,38 48,38 48.5,37.5
GND on Layer 2 "GND" (solid, pour order 15): 27.44,56.5 25.978,54.839 26.002,34.498 27,33.5 31.5,33.5 33.5,31.5 33.5,27.5 35,26 65,26 66.5,27.5 66.5,31 69,33.5 72.5,33.5 74,35 74,56 73,57 68,57 67,58 67,63 66,64 35,64 33.5,62.5 33.5,58.5 31.5,56.5

## Silkscreen, mask and mechanical layers (free items; w line width, h text height)
Top Overlay:
  text "Test PCB Project" at 35.3,29.466 h2
Bottom Overlay:
  rectangle: 34.5,60.5 53,63.5
  lines w0.25: 58,36 67,36 67,45 58,45 58,36
  text "V.Details" at 65.746,61.254 h1.52
  text "12V" at 64.746,53.754 h1.52
  text "GND" at 64.246,39.754 h1.52
Documentation:
  lines w0.381: 85.611,29.396 96.022,29.396 119.638,29.396 141.476,29.396 157.982,29.396 172.456,29.396 ; 85.611,32.444 96.022,32.444 119.638,32.444 141.476,32.444 157.982,32.444 172.456,32.444 ; 85.611,35.492 96.022,35.492 119.638,35.492 141.476,35.492 157.982,35.492 172.456,35.492 ; 85.611,38.54 96.022,38.54 119.638,38.54 141.476,38.54 157.982,38.54 172.456,38.54 ; 85.611,41.588 96.022,41.588 119.638,41.588 141.476,41.588 157.982,41.588 172.456,41.588 ; 85.611,44.636 96.022,44.636 119.638,44.636 141.476,44.636 157.982,44.636 172.456,44.636 ; 85.611,47.684 96.022,47.684 119.638,47.684 141.476,47.684 157.982,47.684 172.456,47.684 ; 85.611,50.732 96.022,50.732 119.638,50.732 141.476,50.732 157.982,50.732 172.456,50.732 ; 85.611,53.78 96.022,53.78 119.638,53.78 141.476,53.78 157.982,53.78 172.456,53.78 ; 85.611,56.828 96.022,56.828 119.638,56.828 141.476,56.828 157.982,56.828 172.456,56.828 ; 85.611,59.876 172.456,59.876 ; 96.022,62.924 96.022,26.348 ; 119.638,62.924 119.638,26.348 ; 141.476,62.924 141.476,26.348 ; 157.982,62.924 157.982,26.348 ; 96.022,26.348 85.611,26.348 85.611,62.924 172.456,62.924 172.456,26.348 157.982,26.348 ; 96.022,26.348 119.638,26.348 ; 119.638,26.348 141.476,26.348 ; 141.476,26.348 157.982,26.348
  text "Layer" at 87.389,60.638 h1.52
  text "Name" at 97.8,60.638 h1.52
  text "Material" at 121.416,60.638 h1.52
  text "Thickness" at 143.254,60.638 h1.52
  text "Constant" at 159.76,60.638 h1.52
  text "Top Overlay" at 97.8,57.59 h1.52
  text "Top Solder" at 97.8,54.542 h1.52
  text "Solder Resist" at 121.416,54.542 h1.52
  text "0.39mil" at 143.254,54.542 h1.52
  text "3.5" at 159.76,54.542 h1.52
  text "1" at 87.389,51.494 h1.52
  text "Top Layer" at 97.8,51.494 h1.52
  text "1.38mil" at 143.254,51.494 h1.52
  text "Dielectric 2" at 97.8,48.446 h1.52
  text "PP-006" at 121.416,48.446 h1.52
  text "4.33mil" at 143.254,48.446 h1.52
  text "4.1" at 159.76,48.446 h1.52
  text "2" at 87.389,45.398 h1.52
  text "Layer 1" at 97.8,45.398 h1.52
  text "CF-004" at 121.416,45.398 h1.52
  text "1.38mil" at 143.254,45.398 h1.52
  text "Dielectric 1" at 97.8,42.35 h1.52
  text "FR-4" at 121.416,42.35 h1.52
  text "47.24mil" at 143.254,42.35 h1.52
  text "4.8" at 159.76,42.35 h1.52
  text "3" at 87.389,39.302 h1.52
  text "Layer 2" at 97.8,39.302 h1.52
  text "CF-004" at 121.416,39.302 h1.52
  text "1.38mil" at 143.254,39.302 h1.52
  text "Dielectric 3" at 97.8,36.254 h1.52
  text "PP-006" at 121.416,36.254 h1.52
  text "4.33mil" at 143.254,36.254 h1.52
  text "4.1" at 159.76,36.254 h1.52
  text "4" at 87.389,33.206 h1.52
  text "Bottom Layer" at 97.8,33.206 h1.52
  text "1.38mil" at 143.254,33.206 h1.52
  text "Bottom Solder" at 97.8,30.158 h1.52
  text "Solder Resist" at 121.416,30.158 h1.52
  text "0.39mil" at 143.254,30.158 h1.52
  text "3.5" at 159.76,30.158 h1.52
  text "Bottom Overlay" at 97.8,27.11 h1.52
Drill Drawing:
  circle w0.254: c27.582,83.229 r0.847
  lines w0.254: 26.736,75.185 27.159,75.185 27.582,74.762 28.006,75.185 28.429,75.185 28.006,75.609 28.429,76.032 28.006,76.032 27.582,76.455 27.159,76.032 26.736,76.032 27.159,75.609 26.736,75.185 ; 26.736,78.572 28.429,78.572 28.429,80.265 26.736,80.265 26.736,78.572
  lines w0.381: 25.217,73.619 203.274,73.619 ; 25.217,85.049 203.274,85.049 ; 39.209,69.809 39.209,88.859 ; 52.922,69.809 52.922,88.859 ; 82.123,69.809 82.123,88.859 ; 94.972,69.809 94.972,88.859 ; 113.611,69.809 113.611,88.859 ; 151.7,69.809 151.7,88.859 ; 166.682,69.809 166.682,88.859 ; 185.625,69.809 185.625,88.859 ; 25.217,69.809 203.274,69.809 203.274,88.859 25.217,88.859 25.217,69.809
  text "Symbol" at 27.503,86.192 h1.83
  text "Count" at 40.352,86.192 h1.83
  text "Hole Size" at 54.065,86.192 h1.83
  text "Plated" at 83.266,86.192 h1.83
  text "Hole Type" at 96.115,86.192 h1.83
  text "Drill Layer Pair" at 114.754,86.192 h1.83
  text "Via/Pad" at 152.843,86.192 h1.83
  text "Pad Shape" at 167.825,86.192 h1.83
  text "Template" at 186.768,86.192 h1.83
  text "22" at 40.352,82.382 h1.52
  text "11.81mil (0.300mm)" at 54.065,82.382 h1.52
  text "PTH" at 83.266,82.382 h1.52
  text "Round" at 96.115,82.382 h1.52
  text "Top Layer - Bottom Layer" at 114.754,82.382 h1.52
  text "Via" at 152.843,82.382 h1.52
  text "Rounded" at 167.825,82.382 h1.52
  text "(Mixed)" at 186.768,82.382 h1.52
  text "6" at 40.352,78.572 h1.52
  text "35.43mil (0.900mm)" at 54.065,78.572 h1.52
  text "PTH" at 83.266,78.572 h1.52
  text "Round" at 96.115,78.572 h1.52
  text "Top Layer - Bottom Layer" at 114.754,78.572 h1.52
  text "Pad" at 152.843,78.572 h1.52
  text "Rounded" at 167.825,78.572 h1.52
  text "c127h90" at 186.768,78.572 h1.52
  text "4" at 40.352,74.762 h1.52
  text "125.98mil (3.200mm)" at 54.065,74.762 h1.52
  text "PTH" at 83.266,74.762 h1.52
  text "Round" at 96.115,74.762 h1.52
  text "Top Layer - Bottom Layer" at 114.754,74.762 h1.52
  text "Pad" at 152.843,74.762 h1.52
  text "Rounded" at 167.825,74.762 h1.52
  text "c550h320" at 186.768,74.762 h1.52
  text "32 Total" at 40.352,70.952 h1.52
PCB Boundary:
  the board outline again, w0.1